# EAGLE board comp-btm (EAGLE 9.6.2)
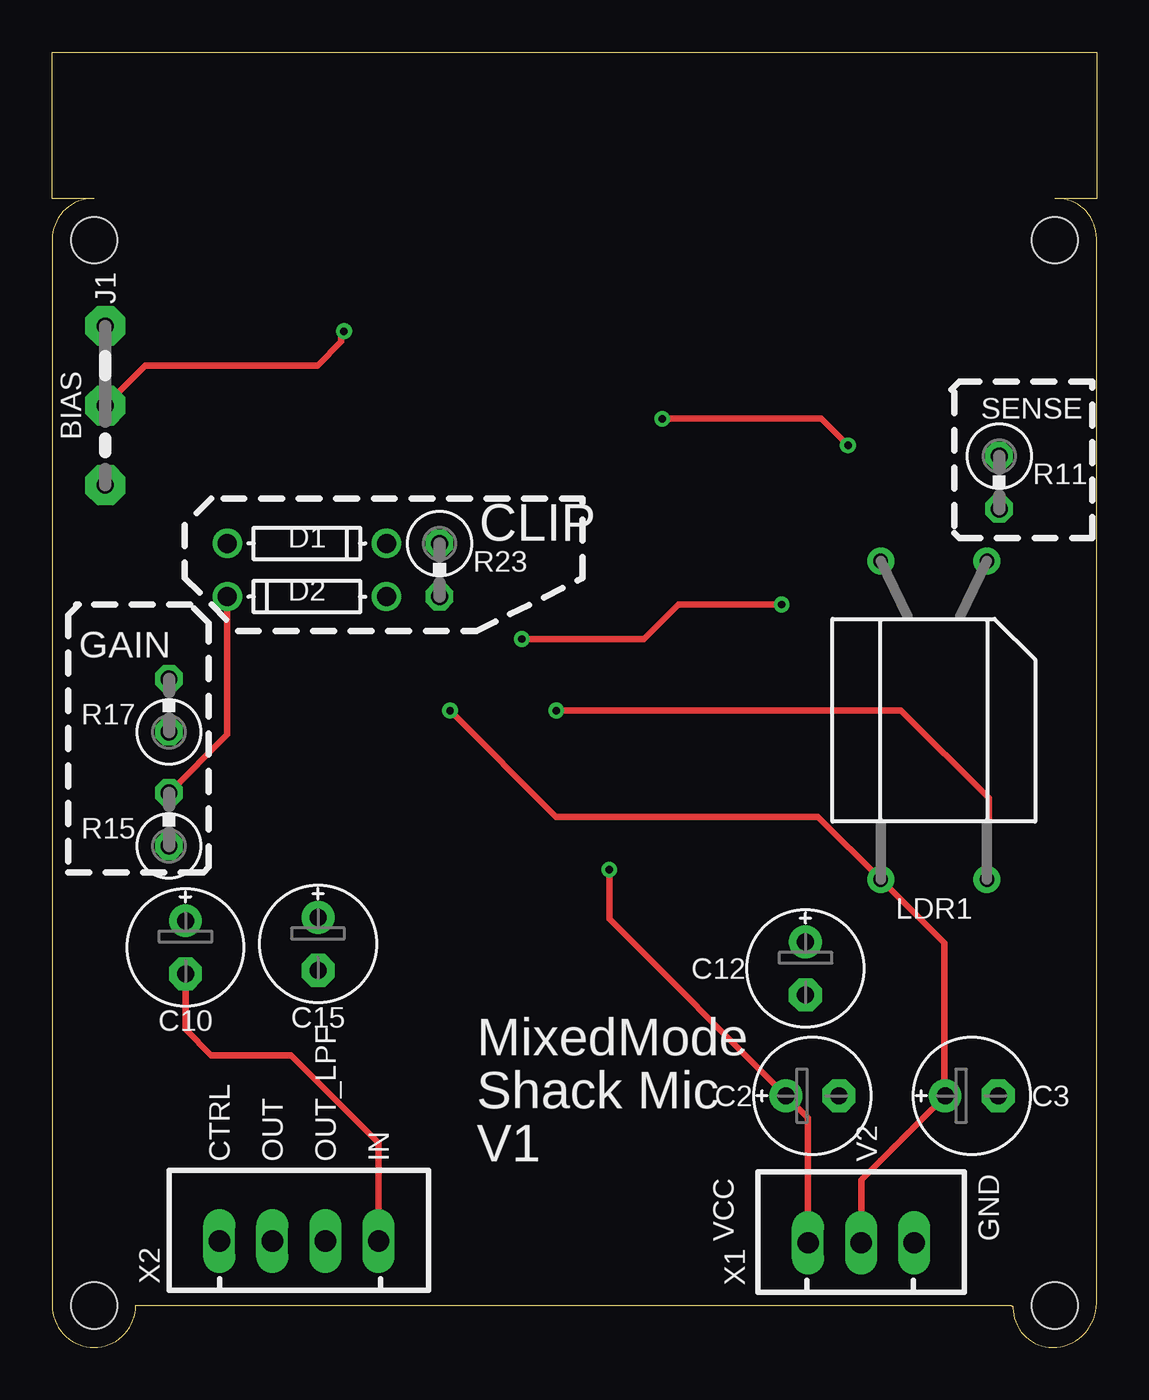
[diagram p0: board, top side]
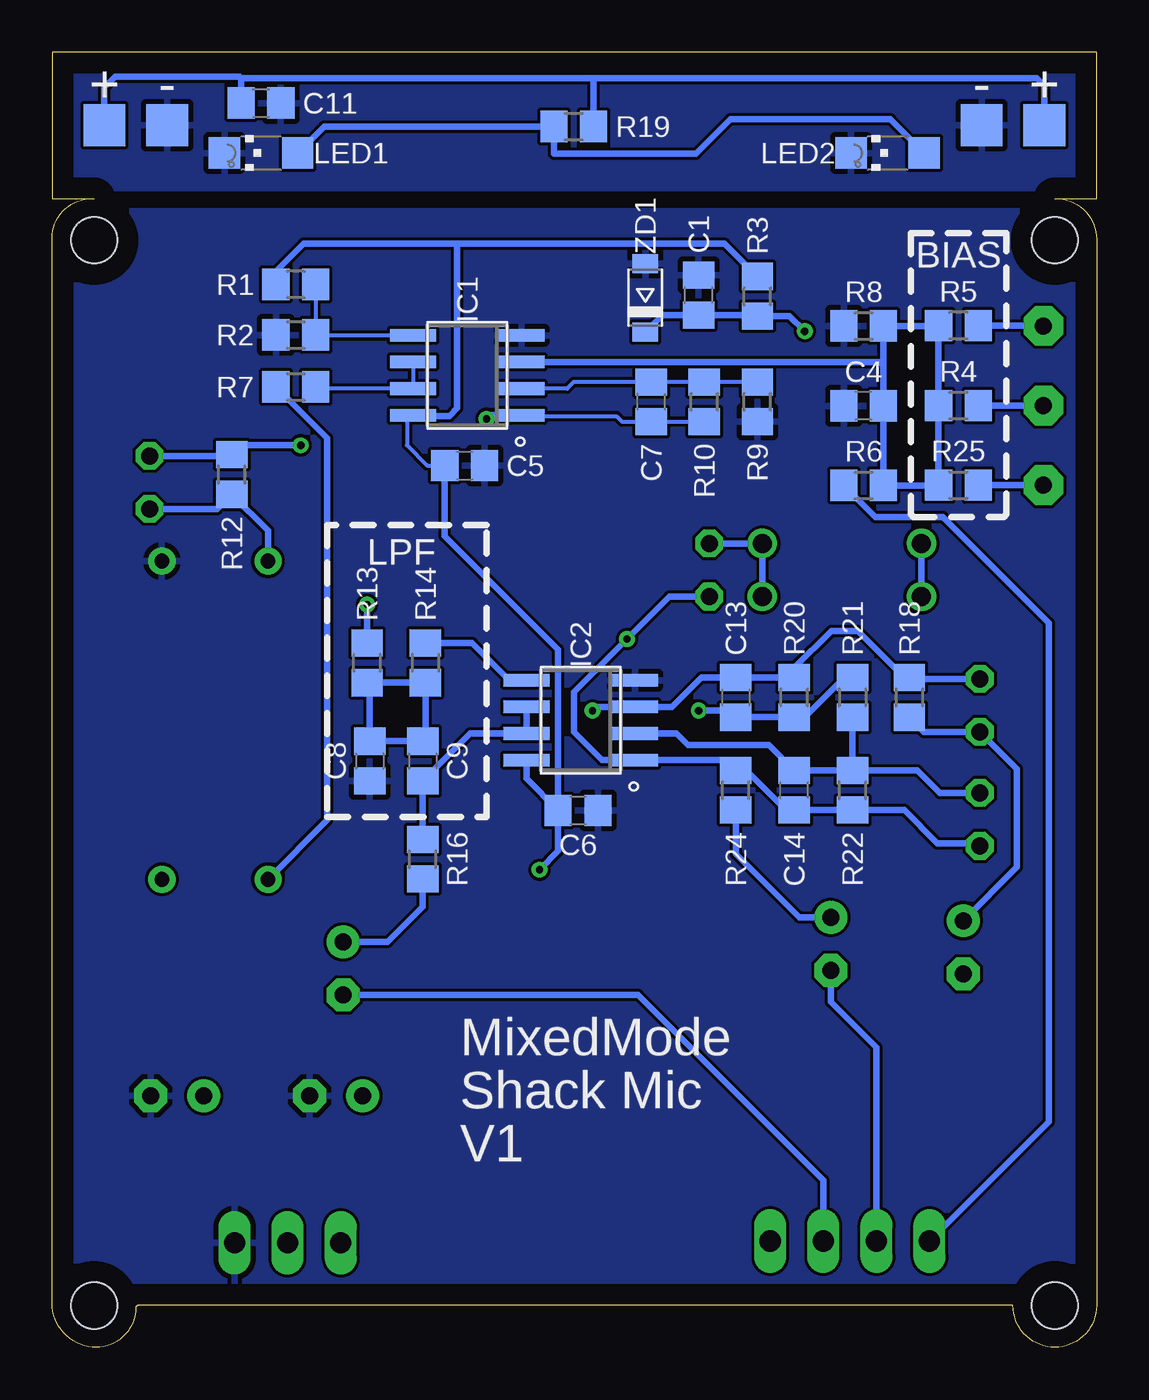
[diagram p1: board, bottom side, seen from below]

Size 50 x 62 mm. Coordinates in mm from the lower left corner, seen from the top.
Outline: 48.1,55 arc-90 50,53.1 50,2.1 arc-90 47.9,0 arc-90 46,1.9 arc90 45.9,2 4,2 arc-90 2,0 arc-90 0,2 0,53.04 arc-90 1.96,55
Outline: 48.1,55 48,55
Outline: 2,55 1.96,55
Outline: 1.96,55 0,55 0,62 50,62 50,55 48.1,55
Copper layers (1*16): Top 0.035mm / dielectric 1.5mm / Bottom 0.035mm
Design rules "default": minimum track width 6mil, minimum drill 0.35mm, track to track 6mil, track to pad 6mil, pad to pad 6mil, via to via 6mil, smd to smd 6mil, copper to edge 40mil, drill to drill 6mil, minimum pad ring 10mil, minimum via ring 8mil, stop-mask expansion 4mil, vias tented up to drill 0mil, thermal gap 10mil
Holes 2.2 mm at 2,53 48,53 2,2 48,2
tKeepout: area 17,6 to 33,22; 1 lines

## Footprints (pad centres in the part's own frame; a part is rotated, then mirrored left to right if it is on the bottom)
C0805 = smd 1.3 x 1.5: 1 -0.95,0; 2 0.95,0
E2,5-6E = drill 0.813 pad 1.575: + -1.27,0 | drill 0.813 pad 1.575 octagon: - 1.27,0
DO-1N4148 = drill 0.9: A -3.81,0; C 3.81,0
SO08 = smd 0.6 x 2.2: 1 -1.905,-2.6; 2 -0.635,-2.6; 3 0.635,-2.6; 4 1.905,-2.6; 5 1.905,2.6; 6 0.635,2.6; 7 -0.635,2.6; 8 -1.905,2.6
04C = drill 0.813 pad 1.905 octagon: 1 -1.905,0; 2 1.905,0; 3 5.715,0
VTL5C = drill 0.7 pad 1.3: 1 -7.62,2.54; 2 -7.62,-2.54; 3 7.62,2.54; 4 7.62,-2.54
CHIPLED_1206 = smd 1.5 x 1.5: A 0,-1.75; C 0,1.75
R0805 = smd 1.3 x 1.5: 1 -0.95,0; 2 0.95,0
0309V = drill 0.813 octagon: 1 -1.27,0; 2 1.27,0
TP20SQ = smd 2 x 2: TP 0,0
JST-XH-03-PACKAGE-LONG-PAD = drill 1.016 long: 1 -2.54,0; 2 0,0; 3 2.54,0
JST-XH-04-PACKAGE-LONG-PAD = drill 1.016 long: 1 -3.81,0; 2 -1.27,0; 3 1.27,0; 4 3.81,0
SOD-123 = smd 0.91 x 1.22: A 1.635,0; C -1.635,0

## Placement (x,y rotation side)
C1  NF  [C0805]  19.05,50.37 90 bottom
C2  10uF  [E2,5-6E]  36.4,12.04 0 top
C3  10uF  [E2,5-6E]  44.02,12.04 0 top
C4  470pF  [C0805]  11.15,45.07 180 bottom
C5  100nF  [C0805]  30.26,42.21 0 bottom
C6  100nF  [C0805]  24.83,25.7 0 bottom
C7  470pF  [C0805]  21.32,45.26 90 bottom
C8  10nF  [C0805]  34.8,28.07 270 bottom
C9  10nF  [C0805]  32.26,28.07 270 bottom
C10  10uF  [E2,5-6E]  6.38,19.15 270 top
C11  1uF  [C0805]  40.01,59.56 0 bottom
C12  10uF  [E2,5-6E]  36.07,18.14 270 top
C13  NF  [C0805]  17.27,31.11 270 bottom
C14  470pF  [C0805]  14.48,26.67 90 bottom
C15  10uF  [E2,5-6E]  12.73,19.3 270 top
D1  [DO-1N4148]  12.19,38.48 0 top
D2  [DO-1N4148]  12.19,35.94 180 top
IC1  LM358D  [SO08]  30.13,46.53 90 bottom
IC2  NE5532D  [SO08]  24.7,30.02 90 bottom
J1  [04C]  2.54,46.99 270 top
LDR1  VTL5C4  [VTL5C]  42.21,30.02 270 top
LED1  [CHIPLED_1206]  40,57.17 90 bottom
LED2  [CHIPLED_1206]  10,57.17 90 bottom
R1  1k  [R0805]  38.34,50.88 180 bottom
R2  1k  [R0805]  38.34,48.47 0 bottom
R3  10k  [R0805]  16.24,50.32 90 bottom
R4  330k  [R0805]  6.62,45.09 0 bottom
R5  330k  [R0805]  6.62,48.91 180 bottom
R6  1k  [R0805]  11.15,41.26 0 bottom
R7  0R  [R0805]  38.34,45.97 0 bottom
R8  1k  [R0805]  11.15,48.9 0 bottom
R9  1k  [R0805]  16.24,45.26 90 bottom
R10  47k  [R0805]  18.78,45.26 90 bottom
R11  NF  [0309V]  45.34,41.4 270 top
R12  390R  [R0805]  41.4,41.78 90 bottom
R13  1k  [R0805]  34.92,32.77 90 bottom
R14  1k  [R0805]  32.13,32.77 270 bottom
R15  NF  [0309V]  5.59,25.27 90 top
R16  100R  [R0805]  32.26,23.37 90 bottom
R17  NF  [0309V]  5.59,30.73 90 top
R18  100R  [R0805]  8.96,31.11 90 bottom
R19  100R  [R0805]  25.03,58.44 0 bottom
R20  NF  [R0805]  14.48,31.11 90 bottom
R21  1k  [R0805]  11.68,31.11 270 bottom
R22  47k  [R0805]  11.68,26.67 90 bottom
R23  NF  [0309V]  18.54,37.21 270 top
R24  100R  [R0805]  17.27,26.67 90 bottom
R25  330k  [R0805]  6.62,41.27 0 bottom
TP1  +  [TP20SQ]  47.5,58.5 0 bottom
TP2  TPTP20SQ  [TP20SQ]  2.5,58.5 0 bottom
TP3  TPTP20SQ  [TP20SQ]  44.5,58.5 0 bottom
TP4  TPTP20SQ  [TP20SQ]  5.5,58.5 0 bottom
X1  POWER  [JST-XH-03-PACKAGE-LONG-PAD]  38.73,5 0 top
X2  AUDIO  [JST-XH-04-PACKAGE-LONG-PAD]  11.81,5.08 0 top
ZD1  3V  [SOD-123]  21.61,50.24 90 bottom

## Library data of the parts
C1-C15 = rcl; SPICEPREFIX: C
D1 D2 LED1 LED2 = adafruit
IC1 IC2 = linear
J1 = jumper
LDR1 = optocoupler; MF: VACTEC PHOTO; MPN: VTL5C9; OC_FARNELL: 2067857; OC_NEWARK: 95F9033
R1-R25 = rcl; SPICEPREFIX: R
TP1-TP4 = testpad
X1 X2 = JST XH Connectors v1-0 2
ZD1 = dp_devices

## Nets
CTRL: R6.1 X2.1
GND: C1.2 C2.- C3.- C4.2 C5.2 C6.2 C8.2 IC1.4 IC2.4 LDR1.1 R2.1 R8.1 R9.1 X1.3 ZD1.A
INPUT: C10.- X2.4
LED_GND: C11.2 LED1.C LED2.C TP3.TP TP4.TP
N$1: IC1.5 R1.1 R2.2
N$2: C7.2 IC1.2 R9.2 R10.2
N$3: J1.1 R5.1
N$4: C14.2 D1.A D2.C IC2.2 R15.2 R21.2 R22.2
N$5: C12.+ R16.1
N$6: C7.1 IC1.1 R10.1 R11.1 R12.2
N$7: C13.1 IC2.3 LDR1.3 R17.2 R18.2 R20.2
N$8: C10.+ R17.1 R18.1
N$9: C1.1 J1.2 R3.1 R4.2 ZD1.C
N$10: LDR1.2 R11.2 R12.1
N$11: C8.1 C9.1 R13.1 R14.2
N$12: C4.1 IC1.3 R4.1 R5.2 R6.2 R8.2 R25.1
N$13: C15.+ R24.1
N$14: IC1.6 IC1.7 R7.2
N$15: J1.3 R25.2
N$17: C9.2 IC2.6 IC2.7 R16.2
N$18: LED1.A LED2.A R19.1
N$19: D1.C D2.A R23.1
N$20: C11.1 R19.2 TP1.TP TP2.TP
N$21: IC2.5 R14.1
OUTPUT: C15.- X2.2
OUTPUT_LPF: C12.- X2.3
V2: C3.+ C13.2 LDR1.4 R7.1 R20.1 R21.1 X1.2
V_OUT: C14.1 IC2.1 R13.2 R15.1 R22.1 R23.2 R24.2
VCC: C2.+ C5.1 C6.1 IC1.8 IC2.8 R1.2 R3.2 X1.1

## Tracks (layer width: path | path; a pad name or v marks a point on that pad's centre or on a via)
CTRL
  Bottom 0.305: R6.1 10.59,39.75 7.37,39.75 2.29,34.67 2.29,10.79 X2.1
GND
  pour Bottom: -1.12,0 52.07,0 52.07,54.38 -1.12,54.38
INPUT
  Top 0.305: X2.4 15.62,9.78 11.43,13.97 7.62,13.97 6.38,15.21 C10.-
LED_GND
  pour Bottom: 0,62 50,62 50,55.5 0,55.5
N$1
  Bottom 0.203: IC1.5 37.36,48.44 R2.2 R1.1
N$2
  Bottom 0.203: R9.2 R10.2 C7.2 25.04,46.21 25.35,45.9 IC1.2
N$3
  Bottom 0.305: R5.1 2.56,48.91 J1.1
N$4
  Top 0.305: R15.2 8.38,29.34 D2.C
  Bottom 0.305: R21.2 R22.2 | R22.2 C14.2 15.69,28.83 19.56,28.83 20.11,29.39 IC2.2 | R22.2 8.57,27.62 7.49,26.54 R15.2 | D1.A D2.C
N$5
  Bottom 0.305: C12.+ 33.93,19.41 32.26,21.08 R16.1
N$6  (via drill 0.35)
  Top 0.305: v29.21,44.45 36.83,44.45 v38.1,43.18
  Bottom 0.203: IC1.1 27.48,44.58 22.99,44.58 22.72,44.31 C7.1 R10.1
  Bottom 0.305: R11.1 41.46,42.67 R12.2 40.95,43.18 v38.1,43.18 | IC1.1 29.04,44.62 v29.21,44.45
N$7  (via drill 0.35)
  Top 0.305: v24.13,30.48 40.64,30.48 44.83,26.29 44.83,22.48 LDR1.3
  Bottom 0.305: R17.2 8.9,32 R18.2 9.21,32.06 11.43,34.29 12.7,34.29 14.48,32.51 R20.2 C13.1 18.91,32.06 20.32,30.66 IC2.3 23.95,30.66 v24.13,30.48
N$8
  Bottom 0.305: R18.1 8.26,29.46 R17.1 3.81,27.69 3.81,22.99 C10.+
N$9  (via drill 0.35)
  Top 0.305: J1.2 4.45,46.99 12.7,46.99 13.84,48.13 13.84,48.64 v13.97,48.64
  Bottom 0.305: R4.2 J1.2 | ZD1.C 20.79,49.42 C1.1 16.3,49.42 R3.1 14.7,49.37 v13.97,48.64
N$10
  Bottom 0.305: R11.2 42.1,40.13 R12.1 39.67,39.1 LDR1.2
N$11
  Bottom 0.305: C8.1 C9.1 32.13,29.14 R14.2 R13.1 34.8,31.69 C8.1
N$12
  Bottom 0.305: 10.2,46.99 C4.1 R6.2 7.58,41.26 R25.1 R4.1 R5.2 7.58,48.9 R8.2 10.2,46.99 | 10.2,46.99 10.38,47.16 IC1.3 | IC1.3
N$13
  Bottom 0.305: R24.1 17.27,23.62 14.22,20.57 C15.+
N$14
  Bottom 0.203: IC1.6 IC1.7 37.31,45.9 R7.2
N$15
  Bottom 0.305: R25.2 J1.3
N$17
  Bottom 0.305: IC2.6 IC2.7 29.99,29.39 C9.2 R16.2
N$18
  Bottom 0.305: LED1.A 36.98,58.44 R19.1 25.98,57.15 19.18,57.15 17.53,58.8 9.88,58.8 LED2.A
N$19
  Bottom 0.305: D2.A D1.C R23.1
N$20
  Bottom 0.305: TP1.TP 47.5,60.32 46.99,60.83 41.02,60.83 40.95,60.77 | C11.1 40.95,60.77 | 40.95,60.77 24,60.77 | 24,60.77 2.85,60.77 2.5,60.41 TP2.TP | R19.2 24.08,60.69 24,60.77
N$21
  Bottom 0.305: R14.1 29.91,33.72 28.11,31.93 IC2.5
OUTPUT
  Bottom 0.305: X2.2 10.54,14.35 12.73,16.54 C15.-
OUTPUT_LPF
  Bottom 0.305: C12.- 21.95,16.87 13.08,8 X2.3
V2  (via drill 0.35)
  Top 0.305: v19.05,30.48 24.13,25.4 36.67,25.4 LDR1.4 42.72,19.35 42.72,12.07 C3.+ 38.73,8.02 X1.2
  Bottom 0.305: R21.1 12.07,32.06 13.97,30.16 R20.1 C13.2 17.59,30.48 v19.05,30.48 | LDR1.4 36.83,25.24 36.83,43.52 R7.1
V_OUT  (via drill 0.35)
  Top 0.305: v34.92,35.56 29.97,35.56 28.32,33.91 v22.48,33.91
  Bottom 0.305: R15.1 5.71,24.13 7.62,24.13 9.21,25.72 R22.1 C14.1 14.86,25.72 16.76,27.62 R24.2 17.77,28.11 IC2.1 23.67,28.11 25.02,29.46 25.02,31.37 v22.48,33.91 20.45,35.94 R23.2 | v34.92,35.56 R13.2
VCC  (via drill 0.35)
  Top 0.305: X1.1 36.19,10.98 C2.+ 26.67,20.5 v26.67,22.86
  Bottom 0.203: C5.1 32.05,42.21 33.02,43.18 33.02,44.34 IC1.8 32.68,44.58 | 30.61,52.7 30.73,52.83 | 39.29,51.52 R1.2
  Bottom 0.305: 32.68,44.58 30.99,44.58 30.61,44.96 30.61,52.7 | 39.29,51.52 37.97,52.83 30.73,52.83 17.81,52.83 R3.2 | C6.1 27.3,27.23 IC2.8 | v26.67,22.86 25.78,23.75 C6.1 | C6.1 25.78,33.4 31.21,38.83 C5.1

## Text on the board
tNames: BIAS | SENSE | CLIP | GAIN | MixedMode | Shack Mic | CTRL | OUT | OUT_LPF | IN | V1 | V2 | VCC | GND
bNames: + | - | - | + | BIAS | LPF | MixedMode | Shack Mic | V1